# Altium PCB AVR精简学习板.PcbDoc (part 10 of 10)
Units mm, origin at the board's own origin, x right, y up, seen from the top; angles counter-clockwise.
Board outline 152.4 x 101.6 mm, 2 copper layers (Top Layer, Bottom Layer); 44 components, 51 nets, 211 pads, 6 vias.
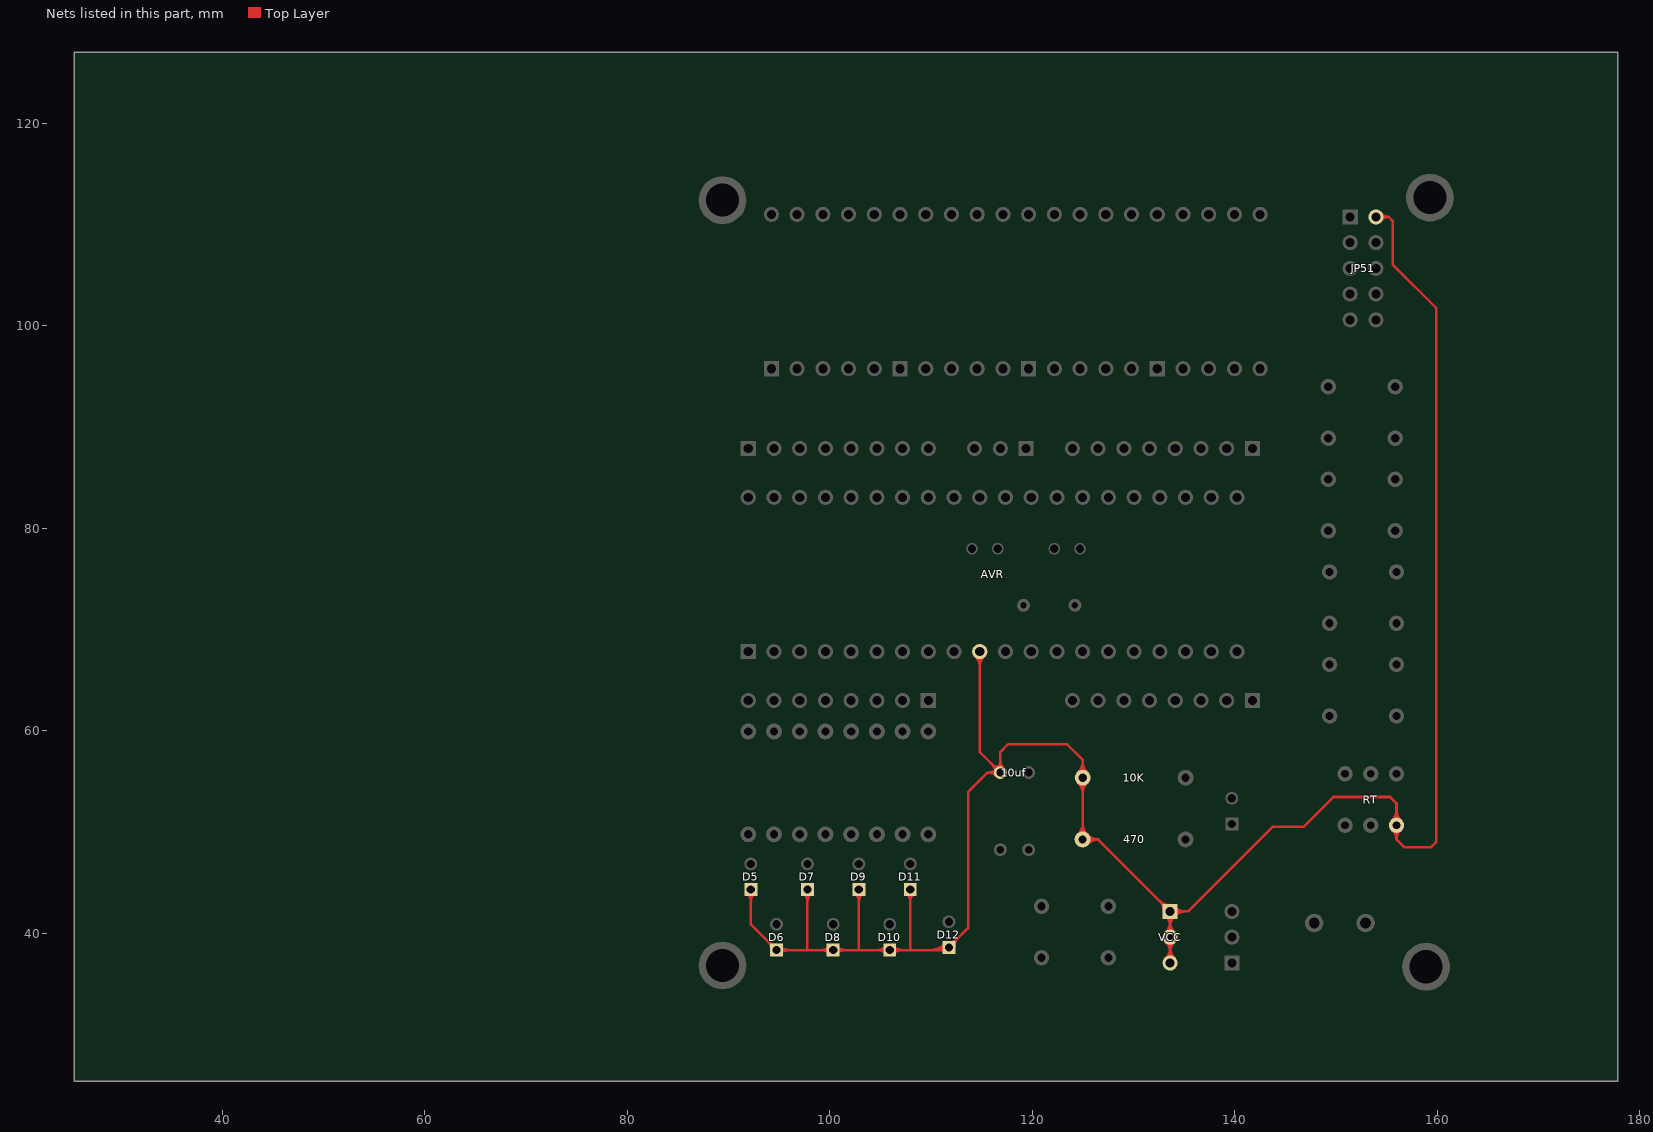
[diagram p10: the nets of this part, all layers, seen from the top]

## Via types
v1: diameter 1.27, hole 0.711, Top Layer to Bottom Layer, 6 vias

## Nets (pads, with @x,y where several pads share a name; then routed paths per layer and width w, separated by ;. In a path a pad name is that pad's centre, name@x,y a point inside that pad or via, vN(x,y) a via of type N, cw(c..) or ccw(c..) an arc to the next point about the centre after c; other vN are vias at no path point) (continued)
VCC: 10K.2 10uf.1@116.84,55.88 470.1 AVR.10 D5.1 D6.1 D7.1 D8.1 D9.1 D10.1 D11.1 D12.1 JP51.2 RT.2 VCC.1 VCC.2 VCC.3 | length 732
  Top Layer w0.254: D5.1@92.202,44.323 92.202,40.894 D6.1@94.742,38.354 111.506,38.354 113.665,40.513 113.665,53.975 115.57,55.88 10uf.1@116.84,55.88 ; 97.79,38.354 D7.1@97.79,44.323 ; 102.87,38.354 D9.1@102.87,44.323 ; D11.1@107.95,44.323 107.95,38.481 108.077,38.354 ; AVR.10@114.808,67.818 114.808,57.912 10uf.1@116.84,55.88 ; VCC.3@133.604,37.084 VCC.1@133.604,42.164 ; JP51.2@153.924,110.744 155.194,110.744 ; JP51.2@154.216,110.518 cw(c154.676,110.162) 154.676,110.744 cw(c154.676,111.326) JP51.2@154.216,110.97 ; JP51.2@154.417,110.363 cw(c155.194,109.761) 155.194,110.744 ; JP51.2@154.417,111.125 ccw(c155.194,111.727) 155.194,110.744 ; RT.2@155.507,51.122 ccw(c154.423,52.206) 155.956,52.206 ccw(c157.489,52.206) RT.2@156.405,51.122 ; RT.2@155.538,50.195 cw(c154.737,49.276) 155.956,49.276 ; RT.2@155.687,50.942 ccw(c155.036,51.593) 155.956,51.593 ccw(c156.876,51.593) RT.2@156.225,50.942 ; RT.2@155.705,50.386 cw(c155.225,49.835) 155.956,49.835 cw(c156.687,49.835) RT.2@156.207,50.386 ; RT.2@156.374,50.195 ccw(c157.175,49.276) 155.956,49.276 ; D5.1@91.843,43.964 cw(c90.976,43.097) 92.202,43.097 ; D5.1@91.843,43.964 cw(c90.976,43.097) 92.202,43.097 ; D5.1@91.843,43.964 cw(c90.976,43.097) 92.202,43.097 ; D5.1@91.843,43.964 cw(c90.976,43.097) 92.202,43.097 ; D5.1@91.843,43.964 cw(c90.976,43.097) 92.202,43.097 ; D5.1@91.843,43.964 cw(c90.976,43.097) 92.202,43.097 ; D5.1@91.843,43.964 cw(c90.976,43.097) 92.202,43.097 ; 92.202,43.097 cw(c93.428,43.097) D5.1@92.561,43.964 ; 92.202,43.097 cw(c93.428,43.097) D5.1@92.561,43.964 ; 92.202,43.097 cw(c93.428,43.097) D5.1@92.561,43.964 ; 92.202,43.097 cw(c93.428,43.097) D5.1@92.561,43.964 ; 92.202,43.097 cw(c93.428,43.097) D5.1@92.561,43.964 ; 92.202,43.097 cw(c93.428,43.097) D5.1@92.561,43.964 ; 92.202,43.097 cw(c93.428,43.097) D5.1@92.561,43.964 ; 93.875,39.221 cw(c93.008,38.354) D6.1@94.234,38.354 ; 93.875,39.221 ccw(c94.742,40.088) D6.1@94.742,38.862 ; 93.875,39.221 cw(c93.008,38.354) D6.1@94.234,38.354 ; 93.875,39.221 ccw(c94.742,40.088) D6.1@94.742,38.862 ; 93.875,39.221 ccw(c94.742,40.088) D6.1@94.742,38.862 ; 93.875,39.221 cw(c93.008,38.354) D6.1@94.234,38.354 ; 93.875,39.221 ccw(c94.742,40.088) D6.1@94.742,38.862 ; 93.875,39.221 cw(c93.008,38.354) D6.1@94.234,38.354 ; 93.875,39.221 ccw(c94.742,40.088) D6.1@94.742,38.862 ; 93.875,39.221 cw(c93.008,38.354) D6.1@94.234,38.354 ; 93.875,39.221 ccw(c94.742,40.088) D6.1@94.742,38.862 ; 93.875,39.221 cw(c93.008,38.354) D6.1@94.234,38.354 ; 93.875,39.221 ccw(c94.742,40.088) D6.1@94.742,38.862 ; 93.875,39.221 cw(c93.008,38.354) D6.1@94.234,38.354 ; D6.1@95.101,37.995 cw(c95.968,37.128) 95.968,38.354 ; D6.1@95.101,37.995 cw(c95.968,37.128) 95.968,38.354 ; D6.1@95.101,37.995 cw(c95.968,37.128) 95.968,38.354 ; D6.1@95.101,37.995 cw(c95.968,37.128) 95.968,38.354 ; D6.1@95.101,37.995 cw(c95.968,37.128) 95.968,38.354 ; D6.1@95.101,37.995 cw(c95.968,37.128) 95.968,38.354 ; D6.1@95.101,37.995 cw(c95.968,37.128) 95.968,38.354 ; D6.1@95.101,38.713 ccw(c95.968,39.58) 95.968,38.354 ; D6.1@95.101,38.713 ccw(c95.968,39.58) 95.968,38.354 ; D6.1@95.101,38.713 ccw(c95.968,39.58) 95.968,38.354 ; D6.1@95.101,38.713 ccw(c95.968,39.58) 95.968,38.354 ; D6.1@95.101,38.713 ccw(c95.968,39.58) 95.968,38.354 ; D6.1@95.101,38.713 ccw(c95.968,39.58) 95.968,38.354 ; D6.1@95.101,38.713 ccw(c95.968,39.58) 95.968,38.354 ; D7.1@97.431,43.964 cw(c96.564,43.097) 97.79,43.097 ; D7.1@97.431,43.964 cw(c96.564,43.097) 97.79,43.097 ; D7.1@97.431,43.964 cw(c96.564,43.097) 97.79,43.097 ; D7.1@97.431,43.964 cw(c96.564,43.097) 97.79,43.097 ; D7.1@97.431,43.964 cw(c96.564,43.097) 97.79,43.097 ; D7.1@97.431,43.964 cw(c96.564,43.097) 97.79,43.097 ; D7.1@97.431,43.964 cw(c96.564,43.097) 97.79,43.097 ; 97.79,43.097 cw(c99.016,43.097) D7.1@98.149,43.964 ; 97.79,43.097 cw(c99.016,43.097) D7.1@98.149,43.964 ; 97.79,43.097 cw(c99.016,43.097) D7.1@98.149,43.964 ; 97.79,43.097 cw(c99.016,43.097) D7.1@98.149,43.964 ; 97.79,43.097 cw(c99.016,43.097) D7.1@98.149,43.964 ; 97.79,43.097 cw(c99.016,43.097) D7.1@98.149,43.964 ; 97.79,43.097 cw(c99.016,43.097) D7.1@98.149,43.964 ; 99.104,38.354 cw(c99.104,37.128) D8.1@99.971,37.995 ; 99.104,38.354 ccw(c99.104,39.58) D8.1@99.971,38.713 ; 99.104,38.354 cw(c99.104,37.128) D8.1@99.971,37.995 ; 99.104,38.354 ccw(c99.104,39.58) D8.1@99.971,38.713 ; 99.104,38.354 ccw(c99.104,39.58) D8.1@99.971,38.713 ; 99.104,38.354 cw(c99.104,37.128) D8.1@99.971,37.995 ; 99.104,38.354 ccw(c99.104,39.58) D8.1@99.971,38.713 ; 99.104,38.354 cw(c99.104,37.128) D8.1@99.971,37.995 ; 99.104,38.354 ccw(c99.104,39.58) D8.1@99.971,38.713 ; 99.104,38.354 cw(c99.104,37.128) D8.1@99.971,37.995 ; 99.104,38.354 ccw(c99.104,39.58) D8.1@99.971,38.713 ; 99.104,38.354 cw(c99.104,37.128) D8.1@99.971,37.995 ; 99.104,38.354 ccw(c99.104,39.58) D8.1@99.971,38.713 ; 99.104,38.354 cw(c99.104,37.128) D8.1@99.971,37.995 ; D8.1@100.689,37.995 cw(c101.556,37.128) 101.556,38.354 ; D8.1@100.689,37.995 cw(c101.556,37.128) 101.556,38.354 ; D8.1@100.689,37.995 cw(c101.556,37.128) 101.556,38.354 ; D8.1@100.689,37.995 cw(c101.556,37.128) 101.556,38.354 ; D8.1@100.689,37.995 cw(c101.556,37.128) 101.556,38.354 ; D8.1@100.689,37.995 cw(c101.556,37.128) 101.556,38.354 ; D8.1@100.689,37.995 cw(c101.556,37.128) 101.556,38.354 ; D8.1@100.689,38.713 ccw(c101.556,39.58) 101.556,38.354 ; D8.1@100.689,38.713 ccw(c101.556,39.58) 101.556,38.354 ; D8.1@100.689,38.713 ccw(c101.556,39.58) 101.556,38.354 ; D8.1@100.689,38.713 ccw(c101.556,39.58) 101.556,38.354 ; D8.1@100.689,38.713 ccw(c101.556,39.58) 101.556,38.354 ; D8.1@100.689,38.713 ccw(c101.556,39.58) 101.556,38.354 ; D8.1@100.689,38.713 ccw(c101.556,39.58) 101.556,38.354 ; D9.1@102.511,43.964 cw(c101.644,43.097) 102.87,43.097 ; D9.1@102.511,43.964 cw(c101.644,43.097) 102.87,43.097 ; D9.1@102.511,43.964 cw(c101.644,43.097) 102.87,43.097 ; D9.1@102.511,43.964 cw(c101.644,43.097) 102.87,43.097 ; D9.1@102.511,43.964 cw(c101.644,43.097) 102.87,43.097 ; D9.1@102.511,43.964 cw(c101.644,43.097) 102.87,43.097 ; D9.1@102.511,43.964 cw(c101.644,43.097) 102.87,43.097 ; 102.87,43.097 cw(c104.096,43.097) D9.1@103.229,43.964 ; 102.87,43.097 cw(c104.096,43.097) D9.1@103.229,43.964 ; 102.87,43.097 cw(c104.096,43.097) D9.1@103.229,43.964 ; 102.87,43.097 cw(c104.096,43.097) D9.1@103.229,43.964 ; 102.87,43.097 cw(c104.096,43.097) D9.1@103.229,43.964 ; 102.87,43.097 cw(c104.096,43.097) D9.1@103.229,43.964 ; 102.87,43.097 cw(c104.096,43.097) D9.1@103.229,43.964 ; 104.692,38.354 cw(c104.692,37.128) D10.1@105.559,37.995 ; 104.692,38.354 ccw(c104.692,39.58) D10.1@105.559,38.713 ; 104.692,38.354 cw(c104.692,37.128) D10.1@105.559,37.995 ; 104.692,38.354 ccw(c104.692,39.58) D10.1@105.559,38.713 ; 104.692,38.354 ccw(c104.692,39.58) D10.1@105.559,38.713 ; 104.692,38.354 cw(c104.692,37.128) D10.1@105.559,37.995 ; 104.692,38.354 ccw(c104.692,39.58) D10.1@105.559,38.713 ; 104.692,38.354 cw(c104.692,37.128) D10.1@105.559,37.995 ; 104.692,38.354 ccw(c104.692,39.58) D10.1@105.559,38.713 ; 104.692,38.354 cw(c104.692,37.128) D10.1@105.559,37.995 ; 104.692,38.354 ccw(c104.692,39.58) D10.1@105.559,38.713 ; 104.692,38.354 cw(c104.692,37.128) D10.1@105.559,37.995 ; 104.692,38.354 ccw(c104.692,39.58) D10.1@105.559,38.713 ; 104.692,38.354 cw(c104.692,37.128) D10.1@105.559,37.995 ; D10.1@106.277,37.995 cw(c107.144,37.128) 107.144,38.354 ; D10.1@106.277,37.995 cw(c107.144,37.128) 107.144,38.354 ; D10.1@106.277,37.995 cw(c107.144,37.128) 107.144,38.354 ; D10.1@106.277,37.995 cw(c107.144,37.128) 107.144,38.354 ; D10.1@106.277,37.995 cw(c107.144,37.128) 107.144,38.354 ; D10.1@106.277,37.995 cw(c107.144,37.128) 107.144,38.354 ; D10.1@106.277,37.995 cw(c107.144,37.128) 107.144,38.354 ; D10.1@106.277,38.713 ccw(c107.144,39.58) 107.144,38.354 ; D10.1@106.277,38.713 ccw(c107.144,39.58) 107.144,38.354 ; D10.1@106.277,38.713 ccw(c107.144,39.58) 107.144,38.354 ; D10.1@106.277,38.713 ccw(c107.144,39.58) 107.144,38.354 ; D10.1@106.277,38.713 ccw(c107.144,39.58) 107.144,38.354 ; D10.1@106.277,38.713 ccw(c107.144,39.58) 107.144,38.354 ; D10.1@106.277,38.713 ccw(c107.144,39.58) 107.144,38.354 ; D11.1@107.591,43.964 cw(c106.724,43.097) 107.95,43.097 ; D11.1@107.591,43.964 cw(c106.724,43.097) 107.95,43.097 ; D11.1@107.591,43.964 cw(c106.724,43.097) 107.95,43.097 ; D11.1@107.591,43.964 cw(c106.724,43.097) 107.95,43.097 ; D11.1@107.591,43.964 cw(c106.724,43.097) 107.95,43.097 ; D11.1@107.591,43.964 cw(c106.724,43.097) 107.95,43.097 ; D11.1@107.591,43.964 cw(c106.724,43.097) 107.95,43.097 ; 107.95,43.097 cw(c109.176,43.097) D11.1@108.309,43.964 ; 107.95,43.097 cw(c109.176,43.097) D11.1@108.309,43.964 ; 107.95,43.097 cw(c109.176,43.097) D11.1@108.309,43.964 ; 107.95,43.097 cw(c109.176,43.097) D11.1@108.309,43.964 ; 107.95,43.097 cw(c109.176,43.097) D11.1@108.309,43.964 ; 107.95,43.097 cw(c109.176,43.097) D11.1@108.309,43.964 ; 107.95,43.097 cw(c109.176,43.097) D11.1@108.309,43.964 ; 109.92,38.354 ccw(c109.92,40.448) D12.1@111.401,38.967 ; 109.92,38.354 ccw(c109.92,40.448) D12.1@111.401,38.967 ; 109.92,38.354 ccw(c109.92,40.448) D12.1@111.401,38.967 ; 109.92,38.354 ccw(c109.92,40.448) D12.1@111.401,38.967 ; 109.92,38.354 ccw(c109.92,40.448) D12.1@111.401,38.967 ; 109.92,38.354 ccw(c109.92,40.448) D12.1@111.401,38.967 ; 109.92,38.354 ccw(c109.92,40.448) D12.1@111.401,38.967 ; 110.534,38.354 ccw(c110.534,39.834) D12.1@111.58,38.788 ; 110.534,38.354 ccw(c110.534,39.834) D12.1@111.58,38.788 ; 110.534,38.354 ccw(c110.534,39.834) D12.1@111.58,38.788 ; 110.534,38.354 ccw(c110.534,39.834) D12.1@111.58,38.788 ; 110.534,38.354 ccw(c110.534,39.834) D12.1@111.58,38.788 ; 110.534,38.354 ccw(c110.534,39.834) D12.1@111.58,38.788 ; 110.534,38.354 ccw(c110.534,39.834) D12.1@111.58,38.788 ; D12.1@111.147,38.354 cw(c111.147,37.995) D12.1@111.401,38.249 ; D12.1@111.147,38.354 ccw(c111.147,39.221) D12.1@111.76,38.608 ; D12.1@111.147,38.354 cw(c111.147,37.995) D12.1@111.401,38.249 ; D12.1@111.147,38.354 ccw(c111.147,39.221) D12.1@111.76,38.608 ; D12.1@111.147,38.354 ccw(c111.147,39.221) D12.1@111.76,38.608 ; D12.1@111.147,38.354 cw(c111.147,37.995) D12.1@111.401,38.249 ; D12.1@111.147,38.354 ccw(c111.147,39.221) D12.1@111.76,38.608 ; D12.1@111.147,38.354 cw(c111.147,37.995) D12.1@111.401,38.249 ; D12.1@111.147,38.354 ccw(c111.147,39.221) D12.1@111.76,38.608 ; D12.1@111.147,38.354 cw(c111.147,37.995) D12.1@111.401,38.249 ; D12.1@111.147,38.354 ccw(c111.147,39.221) D12.1@111.76,38.608 ; D12.1@111.147,38.354 cw(c111.147,37.995) D12.1@111.401,38.249 ; D12.1@111.147,38.354 ccw(c111.147,39.221) D12.1@111.76,38.608 ; D12.1@111.147,38.354 cw(c111.147,37.995) D12.1@111.401,38.249 ; D12.1@111.76,39.116 ccw(c111.76,40.342) 112.627,39.475 ; D12.1@111.76,39.116 ccw(c111.76,40.342) 112.627,39.475 ; D12.1@111.76,39.116 ccw(c111.76,40.342) 112.627,39.475 ; D12.1@111.76,39.116 ccw(c111.76,40.342) 112.627,39.475 ; D12.1@111.76,39.116 ccw(c111.76,40.342) 112.627,39.475 ; D12.1@111.76,39.116 ccw(c111.76,40.342) 112.627,39.475 ; D12.1@111.76,39.116 ccw(c111.76,40.342) 112.627,39.475 ; D12.1@112.268,38.608 cw(c113.494,38.608) 112.627,39.475 ; D12.1@112.268,38.608 cw(c113.494,38.608) 112.627,39.475 ; D12.1@112.268,38.608 cw(c113.494,38.608) 112.627,39.475 ; D12.1@112.268,38.608 cw(c113.494,38.608) 112.627,39.475 ; D12.1@112.268,38.608 cw(c113.494,38.608) 112.627,39.475 ; D12.1@112.268,38.608 cw(c113.494,38.608) 112.627,39.475 ; D12.1@112.268,38.608 cw(c113.494,38.608) 112.627,39.475 ; AVR.10@114.367,67.377 cw(c113.304,66.314) 114.808,66.314 ; AVR.10@114.367,67.377 cw(c113.304,66.314) 114.808,66.314 ; AVR.10@114.367,67.377 cw(c113.304,66.314) 114.808,66.314 ; AVR.10@114.367,67.377 cw(c113.304,66.314) 114.808,66.314 ; AVR.10@114.367,67.377 cw(c113.304,66.314) 114.808,66.314 ; AVR.10@114.367,67.377 cw(c113.304,66.314) 114.808,66.314 ; AVR.10@114.367,67.377 cw(c113.304,66.314) 114.808,66.314 ; AVR.10@114.547,67.557 cw(c113.917,66.927) 114.808,66.927 ; AVR.10@114.547,67.557 cw(c113.917,66.927) 114.808,66.927 ; AVR.10@114.547,67.557 cw(c113.917,66.927) 114.808,66.927 ; AVR.10@114.547,67.557 cw(c113.917,66.927) 114.808,66.927 ; AVR.10@114.547,67.557 cw(c113.917,66.927) 114.808,66.927 ; AVR.10@114.547,67.557 cw(c113.917,66.927) 114.808,66.927 ; AVR.10@114.547,67.557 cw(c113.917,66.927) 114.808,66.927 ; 114.808,66.314 cw(c116.312,66.314) AVR.10@115.249,67.377 ; 114.808,66.314 cw(c116.312,66.314) AVR.10@115.249,67.377 ; 114.808,66.314 cw(c116.312,66.314) AVR.10@115.249,67.377 ; 114.808,66.314 cw(c116.312,66.314) AVR.10@115.249,67.377 ; 114.808,66.314 cw(c116.312,66.314) AVR.10@115.249,67.377 ; 114.808,66.314 cw(c116.312,66.314) AVR.10@115.249,67.377 ; 114.808,66.314 cw(c116.312,66.314) AVR.10@115.249,67.377 ; 114.808,66.927 cw(c115.699,66.927) AVR.10@115.069,67.557 ; 114.808,66.927 cw(c115.699,66.927) AVR.10@115.069,67.557 ; 114.808,66.927 cw(c115.699,66.927) AVR.10@115.069,67.557 ; 114.808,66.927 cw(c115.699,66.927) AVR.10@115.069,67.557 ; 114.808,66.927 cw(c115.699,66.927) AVR.10@115.069,67.557 ; 114.808,66.927 cw(c115.699,66.927) AVR.10@115.069,67.557 ; 114.808,66.927 cw(c115.699,66.927) AVR.10@115.069,67.557 ; 115.614,55.88 cw(c115.614,54.654) 10uf.1@116.481,55.521 ; 115.614,55.88 ccw(c115.614,57.106) 10uf.1@116.481,56.239 ; 115.614,55.88 cw(c115.614,54.654) 10uf.1@116.481,55.521 ; 115.614,55.88 ccw(c115.614,57.106) 10uf.1@116.481,56.239 ; 115.614,55.88 ccw(c115.614,57.106) 10uf.1@116.481,56.239 ; 115.614,55.88 cw(c115.614,54.654) 10uf.1@116.481,55.521 ; 115.614,55.88 ccw(c115.614,57.106) 10uf.1@116.481,56.239 ; 115.614,55.88 cw(c115.614,54.654) 10uf.1@116.481,55.521 ; 115.614,55.88 ccw(c115.614,57.106) 10uf.1@116.481,56.239 ; 115.614,55.88 cw(c115.614,54.654) 10uf.1@116.481,55.521 ; 115.614,55.88 ccw(c115.614,57.106) 10uf.1@116.481,56.239 ; 115.614,55.88 cw(c115.614,54.654) 10uf.1@116.481,55.521 ; 115.614,55.88 ccw(c115.614,57.106) 10uf.1@116.481,56.239 ; 115.614,55.88 cw(c115.614,54.654) 10uf.1@116.481,55.521 ; 115.973,56.747 cw(c115.106,55.88) 10uf.1@116.332,55.88 ; 115.973,56.747 ccw(c116.84,57.614) 10uf.1@116.84,56.388 ; 115.973,56.747 cw(c115.106,55.88) 10uf.1@116.332,55.88 ; 115.973,56.747 ccw(c116.84,57.614) 10uf.1@116.84,56.388 ; 115.973,56.747 ccw(c116.84,57.614) 10uf.1@116.84,56.388 ; 115.973,56.747 cw(c115.106,55.88) 10uf.1@116.332,55.88 ; 115.973,56.747 ccw(c116.84,57.614) 10uf.1@116.84,56.388 ; 115.973,56.747 cw(c115.106,55.88) 10uf.1@116.332,55.88 ; 115.973,56.747 ccw(c116.84,57.614) 10uf.1@116.84,56.388 ; 115.973,56.747 cw(c115.106,55.88) 10uf.1@116.332,55.88 ; 115.973,56.747 ccw(c116.84,57.614) 10uf.1@116.84,56.388 ; 115.973,56.747 cw(c115.106,55.88) 10uf.1@116.332,55.88 ; 115.973,56.747 ccw(c116.84,57.614) 10uf.1@116.84,56.388 ; 115.973,56.747 cw(c115.106,55.88) 10uf.1@116.332,55.88 ; 10uf.1@116.481,56.239 ccw(c115.614,57.106) 116.84,57.106 ; 10uf.1@116.481,56.239 ccw(c115.614,57.106) 116.84,57.106 ; 10uf.1@116.481,56.239 ccw(c115.614,57.106) 116.84,57.106 ; 10uf.1@116.481,56.239 ccw(c115.614,57.106) 116.84,57.106 ; 10uf.1@116.481,56.239 ccw(c115.614,57.106) 116.84,57.106 ; 10uf.1@116.481,56.239 ccw(c115.614,57.106) 116.84,57.106 ; 10uf.1@116.481,56.239 ccw(c115.614,57.106) 116.84,57.106 ; 10uf.1@116.84,55.88 116.84,57.912 117.602,58.674 123.444,58.674 124.972,57.146 124.972,49.283 470.1@124.964,49.275 126.493,49.275 ; 116.84,57.106 ccw(c118.066,57.106) 10uf.1@117.199,56.239 ; 116.84,57.106 ccw(c118.066,57.106) 10uf.1@117.199,56.239 ; 116.84,57.106 ccw(c118.066,57.106) 10uf.1@117.199,56.239 ; 116.84,57.106 ccw(c118.066,57.106) 10uf.1@117.199,56.239 ; 116.84,57.106 ccw(c118.066,57.106) 10uf.1@117.199,56.239 ; 116.84,57.106 ccw(c118.066,57.106) 10uf.1@117.199,56.239 ; 116.84,57.106 ccw(c118.066,57.106) 10uf.1@117.199,56.239 ; 470.1@124.497,49.742 ccw(c123.351,50.888) 124.972,50.888 ; 470.1@124.497,49.742 ccw(c123.351,50.888) 124.972,50.888 ; 470.1@124.497,49.742 ccw(c123.351,50.888) 124.972,50.888 ; 470.1@124.497,49.742 ccw(c123.351,50.888) 124.972,50.888 ; 470.1@124.497,49.742 ccw(c123.351,50.888) 124.972,50.888 ; 470.1@124.497,49.742 ccw(c123.351,50.888) 124.972,50.888 ; 470.1@124.497,49.742 ccw(c123.351,50.888) 124.972,50.888 ; 10K.2@124.505,54.906 cw(c123.377,53.779) 124.972,53.779 ; 10K.2@124.505,54.906 cw(c123.377,53.779) 124.972,53.779 ; 10K.2@124.505,54.906 cw(c123.377,53.779) 124.972,53.779 ; 10K.2@124.505,54.906 cw(c123.377,53.779) 124.972,53.779 ; 10K.2@124.505,54.906 cw(c123.377,53.779) 124.972,53.779 ; 10K.2@124.505,54.906 cw(c123.377,53.779) 124.972,53.779 ; 10K.2@124.505,54.906 cw(c123.377,53.779) 124.972,53.779 ; 10K.2@124.505,55.84 ccw(c123.377,56.967) 124.972,56.967 ; 10K.2@124.505,55.84 ccw(c123.377,56.967) 124.972,56.967 ; 10K.2@124.505,55.84 ccw(c123.377,56.967) 124.972,56.967 ; 10K.2@124.505,55.84 ccw(c123.377,56.967) 124.972,56.967 ; 10K.2@124.505,55.84 ccw(c123.377,56.967) 124.972,56.967 ; 10K.2@124.505,55.84 ccw(c123.377,56.967) 124.972,56.967 ; 10K.2@124.505,55.84 ccw(c123.377,56.967) 124.972,56.967 ; 470.1@124.677,49.562 ccw(c123.965,50.275) 124.972,50.275 ; 470.1@124.677,49.562 ccw(c123.965,50.275) 124.972,50.275 ; 470.1@124.677,49.562 ccw(c123.965,50.275) 124.972,50.275 ; 470.1@124.677,49.562 ccw(c123.965,50.275) 124.972,50.275 ; 470.1@124.677,49.562 ccw(c123.965,50.275) 124.972,50.275 ; 470.1@124.677,49.562 ccw(c123.965,50.275) 124.972,50.275 ; 470.1@124.677,49.562 ccw(c123.965,50.275) 124.972,50.275 ; 10K.2@124.684,55.086 cw(c123.991,54.392) 124.972,54.392 ; 10K.2@124.684,55.086 cw(c123.991,54.392) 124.972,54.392 ; 10K.2@124.684,55.086 cw(c123.991,54.392) 124.972,54.392 ; 10K.2@124.684,55.086 cw(c123.991,54.392) 124.972,54.392 ; 10K.2@124.684,55.086 cw(c123.991,54.392) 124.972,54.392 ; 10K.2@124.684,55.086 cw(c123.991,54.392) 124.972,54.392 ; 10K.2@124.684,55.086 cw(c123.991,54.392) 124.972,54.392 ; 10K.2@124.684,55.66 ccw(c123.991,56.354) 124.972,56.354 ; 10K.2@124.684,55.66 ccw(c123.991,56.354) 124.972,56.354 ; 10K.2@124.684,55.66 ccw(c123.991,56.354) 124.972,56.354 ; 10K.2@124.684,55.66 ccw(c123.991,56.354) 124.972,56.354 ; 10K.2@124.684,55.66 ccw(c123.991,56.354) 124.972,56.354 ; 10K.2@124.684,55.66 ccw(c123.991,56.354) 124.972,56.354 ; 10K.2@124.684,55.66 ccw(c123.991,56.354) 124.972,56.354 ; 124.972,50.238 ccw(c125.927,50.238) 470.1@125.252,49.562 ; 124.972,50.238 ccw(c125.927,50.238) 470.1@125.252,49.562 ; 124.972,50.238 ccw(c125.927,50.238) 470.1@125.252,49.562 ; 124.972,50.238 ccw(c125.927,50.238) 470.1@125.252,49.562 ; 124.972,50.238 ccw(c125.927,50.238) 470.1@125.252,49.562 ; 124.972,50.238 ccw(c125.927,50.238) 470.1@125.252,49.562 ; 124.972,50.238 ccw(c125.927,50.238) 470.1@125.252,49.562 ; 124.972,50.851 ccw(c126.54,50.851) 470.1@125.431,49.742 ; 124.972,50.851 ccw(c126.54,50.851) 470.1@125.431,49.742 ; 124.972,50.851 ccw(c126.54,50.851) 470.1@125.431,49.742 ; 124.972,50.851 ccw(c126.54,50.851) 470.1@125.431,49.742 ; 124.972,50.851 ccw(c126.54,50.851) 470.1@125.431,49.742 ; 124.972,50.851 ccw(c126.54,50.851) 470.1@125.431,49.742 ; 124.972,50.851 ccw(c126.54,50.851) 470.1@125.431,49.742 ; 124.972,53.779 cw(c126.566,53.779) 10K.2@125.439,54.906 ; 124.972,53.779 cw(c126.566,53.779) 10K.2@125.439,54.906 ; 124.972,53.779 cw(c126.566,53.779) 10K.2@125.439,54.906 ; 124.972,53.779 cw(c126.566,53.779) 10K.2@125.439,54.906 ; 124.972,53.779 cw(c126.566,53.779) 10K.2@125.439,54.906 ; 124.972,53.779 cw(c126.566,53.779) 10K.2@125.439,54.906 ; 124.972,53.779 cw(c126.566,53.779) 10K.2@125.439,54.906 ; 124.972,54.392 cw(c125.953,54.392) 10K.2@125.259,55.086 ; 124.972,54.392 cw(c125.953,54.392) 10K.2@125.259,55.086 ; 124.972,54.392 cw(c125.953,54.392) 10K.2@125.259,55.086 ; 124.972,54.392 cw(c125.953,54.392) 10K.2@125.259,55.086 ; 124.972,54.392 cw(c125.953,54.392) 10K.2@125.259,55.086 ; 124.972,54.392 cw(c125.953,54.392) 10K.2@125.259,55.086 ; 124.972,54.392 cw(c125.953,54.392) 10K.2@125.259,55.086 ; 124.972,56.354 ccw(c125.953,56.354) 10K.2@125.259,55.66 ; 124.972,56.354 ccw(c125.953,56.354) 10K.2@125.259,55.66 ; 124.972,56.354 ccw(c125.953,56.354) 10K.2@125.259,55.66 ; 124.972,56.354 ccw(c125.953,56.354) 10K.2@125.259,55.66 ; 124.972,56.354 ccw(c125.953,56.354) 10K.2@125.259,55.66 ; 124.972,56.354 ccw(c125.953,56.354) 10K.2@125.259,55.66 ; 124.972,56.354 ccw(c125.953,56.354) 10K.2@125.259,55.66 ; 124.972,56.967 ccw(c126.566,56.967) 10K.2@125.439,55.84 ; 124.972,56.967 ccw(c126.566,56.967) 10K.2@125.439,55.84 ; 124.972,56.967 ccw(c126.566,56.967) 10K.2@125.439,55.84 ; 124.972,56.967 ccw(c126.566,56.967) 10K.2@125.439,55.84 ; 124.972,56.967 ccw(c126.566,56.967) 10K.2@125.439,55.84 ; 124.972,56.967 ccw(c126.566,56.967) 10K.2@125.439,55.84 ; 124.972,56.967 ccw(c126.566,56.967) 10K.2@125.439,55.84 ; 470.1@125.26,48.996 cw(c125.905,48.389) 125.905,49.275 ; 470.1@125.26,48.996 cw(c125.905,48.389) 125.905,49.275 ; 470.1@125.26,48.996 cw(c125.905,48.389) 125.905,49.275 ; 470.1@125.26,48.996 cw(c125.905,48.389) 125.905,49.275 ; 470.1@125.26,48.996 cw(c125.905,48.389) 125.905,49.275 ; 470.1@125.26,48.996 cw(c125.905,48.389) 125.905,49.275 ; 470.1@125.26,48.996 cw(c125.905,48.389) 125.905,49.275 ; 470.1@125.26,49.554 ccw(c125.905,50.161) 125.905,49.275 ; 470.1@125.26,49.554 ccw(c125.905,50.161) 125.905,49.275 ; 470.1@125.26,49.554 ccw(c125.905,50.161) 125.905,49.275 ; 470.1@125.26,49.554 ccw(c125.905,50.161) 125.905,49.275 ; 470.1@125.26,49.554 ccw(c125.905,50.161) 125.905,49.275 ; 470.1@125.26,49.554 ccw(c125.905,50.161) 125.905,49.275 ; 470.1@125.26,49.554 ccw(c125.905,50.161) 125.905,49.275 ; 470.1@125.445,48.822 cw(c126.493,47.836) 126.493,49.275 ; 470.1@125.445,48.822 cw(c126.493,47.836) 126.493,49.275 ; 470.1@125.445,48.822 cw(c126.493,47.836) 126.493,49.275 ; 470.1@125.445,48.822 cw(c126.493,47.836) 126.493,49.275 ; 470.1@125.445,48.822 cw(c126.493,47.836) 126.493,49.275 ; 470.1@125.445,48.822 cw(c126.493,47.836) 126.493,49.275 ; 470.1@125.445,48.822 cw(c126.493,47.836) 126.493,49.275 ; 470.1@125.445,49.728 ccw(c126.493,50.714) 126.493,49.275 ; 470.1@125.445,49.728 ccw(c126.493,50.714) 126.493,49.275 ; 470.1@125.445,49.728 ccw(c126.493,50.714) 126.493,49.275 ; 470.1@125.445,49.728 ccw(c126.493,50.714) 126.493,49.275 ; 470.1@125.445,49.728 ccw(c126.493,50.714) 126.493,49.275 ; 470.1@125.445,49.728 ccw(c126.493,50.714) 126.493,49.275 ; 470.1@125.445,49.728 ccw(c126.493,50.714) 126.493,49.275 ; 126.493,49.275 VCC.1@133.604,42.164 ; 132.54,43.228 cw(c131.477,42.164) VCC.1@132.981,42.164 ; 132.54,43.228 ccw(c133.604,44.291) VCC.1@133.604,42.787 ; 132.54,43.228 cw(c131.477,42.164) VCC.1@132.981,42.164 ; 132.54,43.228 ccw(c133.604,44.291) VCC.1@133.604,42.787 ; 132.54,43.228 ccw(c133.604,44.291) VCC.1@133.604,42.787 ; 132.54,43.228 cw(c131.477,42.164) VCC.1@132.981,42.164 ; 132.54,43.228 ccw(c133.604,44.291) VCC.1@133.604,42.787 ; 132.54,43.228 cw(c131.477,42.164) VCC.1@132.981,42.164 ; 132.54,43.228 ccw(c133.604,44.291) VCC.1@133.604,42.787 ; 132.54,43.228 cw(c131.477,42.164) VCC.1@132.981,42.164 ; 132.54,43.228 ccw(c133.604,44.291) VCC.1@133.604,42.787 ; 132.54,43.228 cw(c131.477,42.164) VCC.1@132.981,42.164 ; 132.54,43.228 ccw(c133.604,44.291) VCC.1@133.604,42.787 ; 132.54,43.228 cw(c131.477,42.164) VCC.1@132.981,42.164 ; VCC.1@132.974,42.794 cw(c132.344,42.164) VCC.1@133.235,42.164 ; VCC.1@132.974,42.794 ccw(c133.604,43.424) VCC.1@133.604,42.533 ; VCC.1@132.974,42.794 cw(c132.344,42.164) VCC.1@133.235,42.164 ; VCC.1@132.974,42.794 ccw(c133.604,43.424) VCC.1@133.604,42.533 ; VCC.1@132.974,42.794 ccw(c133.604,43.424) VCC.1@133.604,42.533 ; VCC.1@132.974,42.794 cw(c132.344,42.164) VCC.1@133.235,42.164 ; VCC.1@132.974,42.794 ccw(c133.604,43.424) VCC.1@133.604,42.533 ; VCC.1@132.974,42.794 cw(c132.344,42.164) VCC.1@133.235,42.164 ; VCC.1@132.974,42.794 ccw(c133.604,43.424) VCC.1@133.604,42.533 ; VCC.1@132.974,42.794 cw(c132.344,42.164) VCC.1@133.235,42.164 ; VCC.1@132.974,42.794 ccw(c133.604,43.424) VCC.1@133.604,42.533 ; VCC.1@132.974,42.794 cw(c132.344,42.164) VCC.1@133.235,42.164 ; VCC.1@132.974,42.794 ccw(c133.604,43.424) VCC.1@133.604,42.533 ; VCC.1@132.974,42.794 cw(c132.344,42.164) VCC.1@133.235,42.164 ; VCC.3@133.163,37.525 ccw(c132.1,38.588) 133.604,38.588 ; VCC.3@133.163,37.525 ccw(c132.1,38.588) 133.604,38.588 ; VCC.3@133.163,37.525 ccw(c132.1,38.588) 133.604,38.588 ; VCC.3@133.163,37.525 ccw(c132.1,38.588) 133.604,38.588 ; VCC.3@133.163,37.525 ccw(c132.1,38.588) 133.604,38.588 ; VCC.3@133.163,37.525 ccw(c132.1,38.588) 133.604,38.588 ; VCC.3@133.163,37.525 ccw(c132.1,38.588) 133.604,38.588 ; VCC.2@133.163,39.183 cw(c132.1,38.12) 133.604,38.12 ; VCC.2@133.163,39.183 cw(c132.1,38.12) 133.604,38.12 ; VCC.2@133.163,39.183 cw(c132.1,38.12) 133.604,38.12 ; VCC.2@133.163,39.183 cw(c132.1,38.12) 133.604,38.12 ; VCC.2@133.163,39.183 cw(c132.1,38.12) 133.604,38.12 ; VCC.2@133.163,39.183 cw(c132.1,38.12) 133.604,38.12 ; VCC.2@133.163,39.183 cw(c132.1,38.12) 133.604,38.12 ; VCC.2@133.163,40.065 ccw(c132.1,41.128) 133.604,41.128 ; VCC.2@133.163,40.065 ccw(c132.1,41.128) 133.604,41.128 ; VCC.2@133.163,40.065 ccw(c132.1,41.128) 133.604,41.128 ; VCC.2@133.163,40.065 ccw(c132.1,41.128) 133.604,41.128 ; VCC.2@133.163,40.065 ccw(c132.1,41.128) 133.604,41.128 ; VCC.2@133.163,40.065 ccw(c132.1,41.128) 133.604,41.128 ; VCC.2@133.163,40.065 ccw(c132.1,41.128) 133.604,41.128 ; VCC.1@133.163,41.723 cw(c132.1,40.66) 133.604,40.66 ; VCC.1@133.163,41.723 cw(c132.1,40.66) 133.604,40.66 ; VCC.1@133.163,41.723 cw(c132.1,40.66) 133.604,40.66 ; VCC.1@133.163,41.723 cw(c132.1,40.66) 133.604,40.66 ; VCC.1@133.163,41.723 cw(c132.1,40.66) 133.604,40.66 ; VCC.1@133.163,41.723 cw(c132.1,40.66) 133.604,40.66 ; VCC.1@133.163,41.723 cw(c132.1,40.66) 133.604,40.66 ; VCC.3@133.343,37.345 ccw(c132.713,37.975) 133.604,37.975 ; VCC.3@133.343,37.345 ccw(c132.713,37.975) 133.604,37.975 ; VCC.3@133.343,37.345 ccw(c132.713,37.975) 133.604,37.975 ; VCC.3@133.343,37.345 ccw(c132.713,37.975) 133.604,37.975 ; VCC.3@133.343,37.345 ccw(c132.713,37.975) 133.604,37.975 ; VCC.3@133.343,37.345 ccw(c132.713,37.975) 133.604,37.975 ; VCC.3@133.343,37.345 ccw(c132.713,37.975) 133.604,37.975 ; VCC.2@133.343,39.363 cw(c132.713,38.733) 133.604,38.733 ; VCC.2@133.343,39.363 cw(c132.713,38.733) 133.604,38.733 ; VCC.2@133.343,39.363 cw(c132.713,38.733) 133.604,38.733 ; VCC.2@133.343,39.363 cw(c132.713,38.733) 133.604,38.733 ; VCC.2@133.343,39.363 cw(c132.713,38.733) 133.604,38.733 ; VCC.2@133.343,39.363 cw(c132.713,38.733) 133.604,38.733 ; VCC.2@133.343,39.363 cw(c132.713,38.733) 133.604,38.733 ; VCC.2@133.343,39.885 ccw(c132.713,40.515) 133.604,40.515 ; VCC.2@133.343,39.885 ccw(c132.713,40.515) 133.604,40.515 ; VCC.2@133.343,39.885 ccw(c132.713,40.515) 133.604,40.515 ; VCC.2@133.343,39.885 ccw(c132.713,40.515) 133.604,40.515 ; VCC.2@133.343,39.885 ccw(c132.713,40.515) 133.604,40.515 ; VCC.2@133.343,39.885 ccw(c132.713,40.515) 133.604,40.515 ; VCC.2@133.343,39.885 ccw(c132.713,40.515) 133.604,40.515 ; VCC.1@133.343,41.903 cw(c132.713,41.273) 133.604,41.273 ; VCC.1@133.343,41.903 cw(c132.713,41.273) 133.604,41.273 ; VCC.1@133.343,41.903 cw(c132.713,41.273) 133.604,41.273 ; VCC.1@133.343,41.903 cw(c132.713,41.273) 133.604,41.273 ; VCC.1@133.343,41.903 cw(c132.713,41.273) 133.604,41.273 ; VCC.1@133.343,41.903 cw(c132.713,41.273) 133.604,41.273 ; VCC.1@133.343,41.903 cw(c132.713,41.273) 133.604,41.273 ; 133.604,37.975 ccw(c134.495,37.975) VCC.3@133.865,37.345 ; 133.604,37.975 ccw(c134.495,37.975) VCC.3@133.865,37.345 ; 133.604,37.975 ccw(c134.495,37.975) VCC.3@133.865,37.345 ; 133.604,37.975 ccw(c134.495,37.975) VCC.3@133.865,37.345 ; 133.604,37.975 ccw(c134.495,37.975) VCC.3@133.865,37.345 ; 133.604,37.975 ccw(c134.495,37.975) VCC.3@133.865,37.345 ; 133.604,37.975 ccw(c134.495,37.975) VCC.3@133.865,37.345 ; 133.604,38.12 cw(c135.108,38.12) VCC.2@134.045,39.183 ; 133.604,38.12 cw(c135.108,38.12) VCC.2@134.045,39.183 ; 133.604,38.12 cw(c135.108,38.12) VCC.2@134.045,39.183 ; 133.604,38.12 cw(c135.108,38.12) VCC.2@134.045,39.183 ; 133.604,38.12 cw(c135.108,38.12) VCC.2@134.045,39.183 ; 133.604,38.12 cw(c135.108,38.12) VCC.2@134.045,39.183 ; 133.604,38.12 cw(c135.108,38.12) VCC.2@134.045,39.183 ; 133.604,38.588 ccw(c135.108,38.588) VCC.3@134.045,37.525 ; 133.604,38.588 ccw(c135.108,38.588) VCC.3@134.045,37.525 ; 133.604,38.588 ccw(c135.108,38.588) VCC.3@134.045,37.525 ; 133.604,38.588 ccw(c135.108,38.588) VCC.3@134.045,37.525 ; 133.604,38.588 ccw(c135.108,38.588) VCC.3@134.045,37.525 ; 133.604,38.588 ccw(c135.108,38.588) VCC.3@134.045,37.525 ; 133.604,38.588 ccw(c135.108,38.588) VCC.3@134.045,37.525 ; 133.604,38.733 cw(c134.495,38.733) VCC.2@133.865,39.363 ; 133.604,38.733 cw(c134.495,38.733) VCC.2@133.865,39.363 ; 133.604,38.733 cw(c134.495,38.733) VCC.2@133.865,39.363 ; 133.604,38.733 cw(c134.495,38.733) VCC.2@133.865,39.363 ; 133.604,38.733 cw(c134.495,38.733) VCC.2@133.865,39.363 ; 133.604,38.733 cw(c134.495,38.733) VCC.2@133.865,39.363 ; 133.604,38.733 cw(c134.495,38.733) VCC.2@133.865,39.363 ; 133.604,40.515 ccw(c134.495,40.515) VCC.2@133.865,39.885 ; 133.604,40.515 ccw(c134.495,40.515) VCC.2@133.865,39.885 ; 133.604,40.515 ccw(c134.495,40.515) VCC.2@133.865,39.885 ; 133.604,40.515 ccw(c134.495,40.515) VCC.2@133.865,39.885 ; 133.604,40.515 ccw(c134.495,40.515) VCC.2@133.865,39.885 ; 133.604,40.515 ccw(c134.495,40.515) VCC.2@133.865,39.885 ; 133.604,40.515 ccw(c134.495,40.515) VCC.2@133.865,39.885 ; 133.604,40.66 cw(c135.108,40.66) VCC.1@134.045,41.723 ; 133.604,40.66 cw(c135.108,40.66) VCC.1@134.045,41.723 ; 133.604,40.66 cw(c135.108,40.66) VCC.1@134.045,41.723 ; 133.604,40.66 cw(c135.108,40.66) VCC.1@134.045,41.723 ; 133.604,40.66 cw(c135.108,40.66) VCC.1@134.045,41.723 ; 133.604,40.66 cw(c135.108,40.66) VCC.1@134.045,41.723 ; 133.604,40.66 cw(c135.108,40.66) VCC.1@134.045,41.723 ; 133.604,41.128 ccw(c135.108,41.128) VCC.2@134.045,40.065 ; 133.604,41.128 ccw(c135.108,41.128) VCC.2@134.045,40.065 ; 133.604,41.128 ccw(c135.108,41.128) VCC.2@134.045,40.065 ; 133.604,41.128 ccw(c135.108,41.128) VCC.2@134.045,40.065 ; 133.604,41.128 ccw(c135.108,41.128) VCC.2@134.045,40.065 ; 133.604,41.128 ccw(c135.108,41.128) VCC.2@134.045,40.065 ; 133.604,41.128 ccw(c135.108,41.128) VCC.2@134.045,40.065 ; 133.604,41.273 cw(c134.495,41.273) VCC.1@133.865,41.903 ; 133.604,41.273 cw(c134.495,41.273) VCC.1@133.865,41.903 ; 133.604,41.273 cw(c134.495,41.273) VCC.1@133.865,41.903 ; 133.604,41.273 cw(c134.495,41.273) VCC.1@133.865,41.903 ; 133.604,41.273 cw(c134.495,41.273) VCC.1@133.865,41.903 ; 133.604,41.273 cw(c134.495,41.273) VCC.1@133.865,41.903 ; 133.604,41.273 cw(c134.495,41.273) VCC.1@133.865,41.903 ; VCC.1@133.604,42.164 135.382,42.164 143.764,50.546 146.812,50.546 149.733,53.467 155.321,53.467 155.956,52.832 155.956,49.276 ; VCC.1@133.865,41.903 cw(c134.495,41.273) 134.495,42.164 ; VCC.1@133.865,41.903 cw(c134.495,41.273) 134.495,42.164 ; VCC.1@133.865,41.903 cw(c134.495,41.273) 134.495,42.164 ; VCC.1@133.865,41.903 cw(c134.495,41.273) 134.495,42.164 ; VCC.1@133.865,41.903 cw(c134.495,41.273) 134.495,42.164 ; VCC.1@133.865,41.903 cw(c134.495,41.273) 134.495,42.164 ; VCC.1@133.865,41.903 cw(c134.495,41.273) 134.495,42.164 ; VCC.1@133.865,42.425 ccw(c134.495,43.055) 134.495,42.164 ; VCC.1@133.865,42.425 ccw(c134.495,43.055) 134.495,42.164 ; VCC.1@133.865,42.425 ccw(c134.495,43.055) 134.495,42.164 ; VCC.1@133.865,42.425 ccw(c134.495,43.055) 134.495,42.164 ; VCC.1@133.865,42.425 ccw(c134.495,43.055) 134.495,42.164 ; VCC.1@133.865,42.425 ccw(c134.495,43.055) 134.495,42.164 ; VCC.1@133.865,42.425 ccw(c134.495,43.055) 134.495,42.164 ; VCC.1@134.045,41.723 cw(c135.108,40.66) 135.108,42.164 ; VCC.1@134.045,41.723 cw(c135.108,40.66) 135.108,42.164 ; VCC.1@134.045,41.723 cw(c135.108,40.66) 135.108,42.164 ; VCC.1@134.045,41.723 cw(c135.108,40.66) 135.108,42.164 ; VCC.1@134.045,41.723 cw(c135.108,40.66) 135.108,42.164 ; VCC.1@134.045,41.723 cw(c135.108,40.66) 135.108,42.164 ; VCC.1@134.045,41.723 cw(c135.108,40.66) 135.108,42.164 ; VCC.1@134.045,42.605 ccw(c135.108,43.668) 135.108,42.164 ; VCC.1@134.045,42.605 ccw(c135.108,43.668) 135.108,42.164 ; VCC.1@134.045,42.605 ccw(c135.108,43.668) 135.108,42.164 ; VCC.1@134.045,42.605 ccw(c135.108,43.668) 135.108,42.164 ; VCC.1@134.045,42.605 ccw(c135.108,43.668) 135.108,42.164 ; VCC.1@134.045,42.605 ccw(c135.108,43.668) 135.108,42.164 ; VCC.1@134.045,42.605 ccw(c135.108,43.668) 135.108,42.164 ; 155.194,110.744 155.575,110.363 155.575,106.045 159.893,101.727 159.893,49.022 159.385,48.514 156.718,48.514 155.956,49.276
pads on no net: D1.8 D2.8 D3.8 D4.3 JP51.3 PC4.1 PC4.3 PC5.1 PC5.3 PC7.1 PC7.3 RESET.1 RESET.3 RT.0 RT.3 RT.4 RT.5
copper on no net: | length 141.8
  Top Layer w0.254: 80.899,34.671 81.407,33.147 ; 80.899,115.189 81.407,116.713 ; 81.153,33.147 81.661,33.147 ; 81.153,116.713 81.661,116.713 ; 81.407,66.906 81.407,33.147 ; 81.407,82.954 81.407,116.713 ; 81.915,34.671 81.407,33.147 ; 81.915,115.189 81.407,116.713 ; 85.597,119.38 85.599,118.872 ; 87.12,119.639 85.598,119.126 ; 87.124,118.623 85.598,119.126 ; 115.293,119.224 85.598,119.126 ; 132.865,119.282 162.56,119.38 ; 161.034,119.883 162.56,119.38 ; 161.038,118.867 162.56,119.38 ; 162.559,119.634 162.561,119.126

## Polygon pours and split planes (outlines as drawn)
no net on Top Layer (hatched 45Degree grid 0.508 track 0.203): 86.233,115.57 161.925,115.57 161.925,33.909 86.36,33.909 86.36,115.57
no net on Bottom Layer (hatched 45Degree grid 0.508 track 0.203): 86.36,115.57 161.925,115.57 161.925,34.036 86.487,34.036 86.487,115.57

## Keep-outs
Keep-Out Layer:
  lines w0.254: 85.598,116.205 85.979,116.205
  lines w0.6: 85.598,33.528 85.598,114.935 85.598,116.205 ; 85.852,33.147 162.687,33.274 ; 85.979,116.205 162.56,116.205 162.56,33.655

## Other copper
Top Layer:
  text "76.9624 (mm)" at 115.55,118.311 h1.52 r0.19
  text "83.566 (mm)" at 82.321,67.16 h1.52 r90

## Silkscreen, mask and mechanical layers (free items; w line width, h text height)
Top Overlay:
  drawing of 657 lines, arcs and shapes, not listed
  text "http://www.ourhc.cn" at 104.521,113.792 h1.76
  text "SN:250347000" at 142.494,113.665 h1.22
  text "31" at 113.538,90.297 h1
  text "32" at 115.951,90.297 h1
  text "30" at 118.745,90.297 h1
  text "VCC" at 145.415,34.163 h1.34
  text "GND" at 151.384,34.163 h1.34

## Text inside footprints (layer, text, board x,y; h text height)
JP51: Top Overlay "10" at 153.416,99.06 h1.27 r270; Top Overlay "9" at 150.876,99.06 h1.27 r270; Top Overlay "1" at 150.876,112.776 h1.27 r270; Top Overlay "2" at 153.416,113.284 h1.27 r270